# Altium PCB PCB1.PcbDoc
Units mil, origin at the board's own origin, x right, y up, seen from the top; angles counter-clockwise.
Board outline 1540 x 765 mil, 2 copper layers (Top Layer, Bottom Layer); 23 components, 44 nets, 149 pads, 10 vias.
Unrouted connection lines stored in the file: 11.
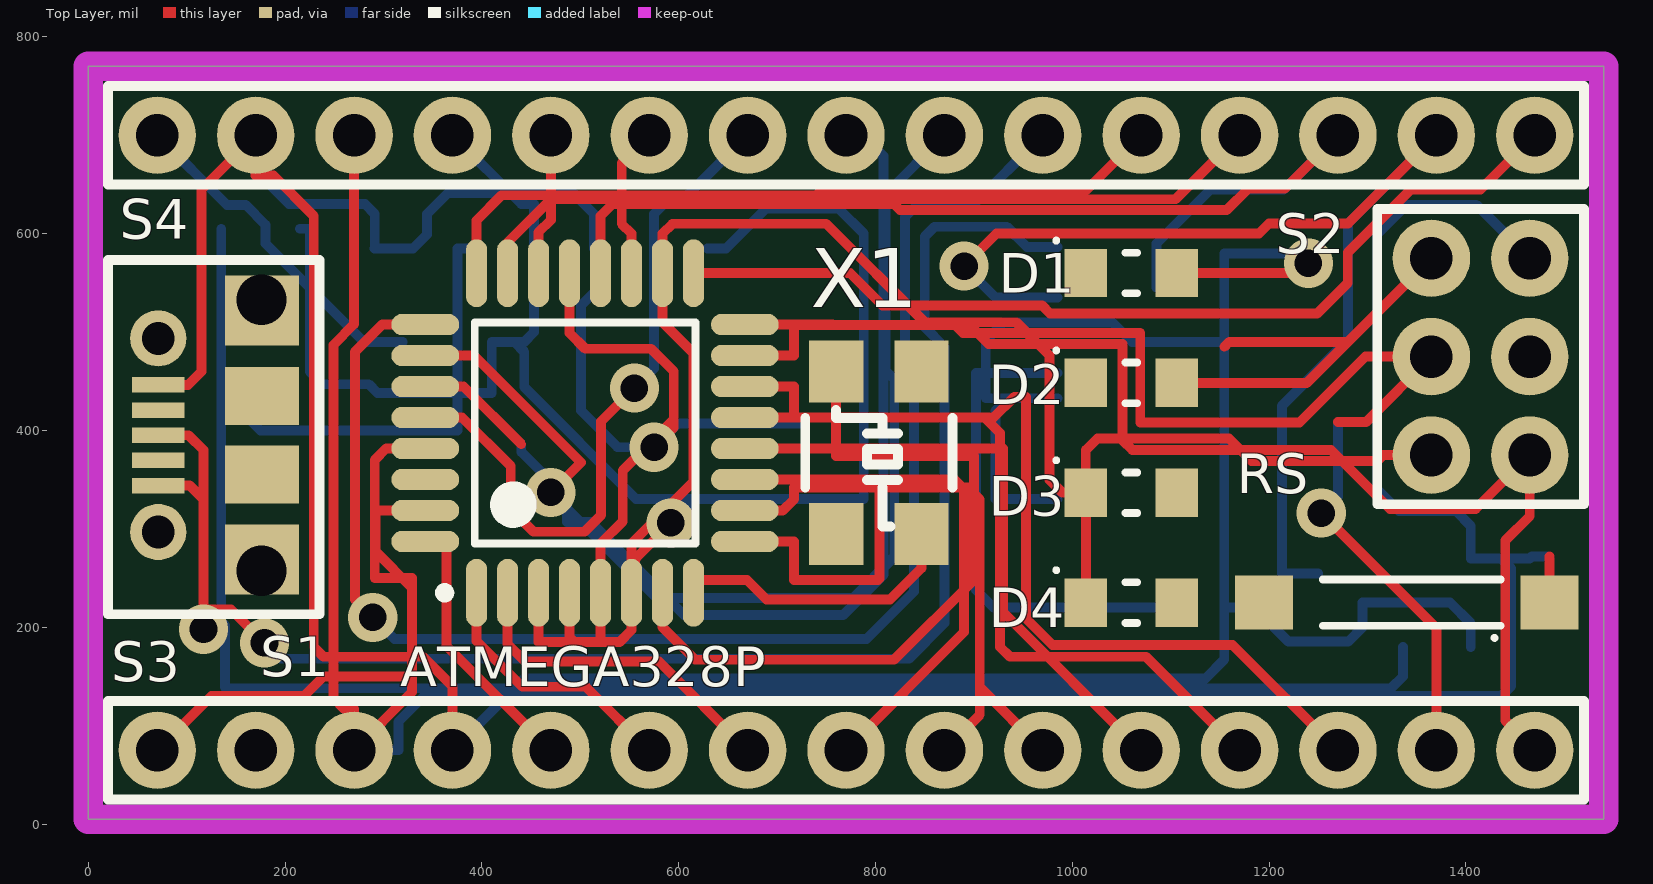
[diagram p0: Top Layer view]
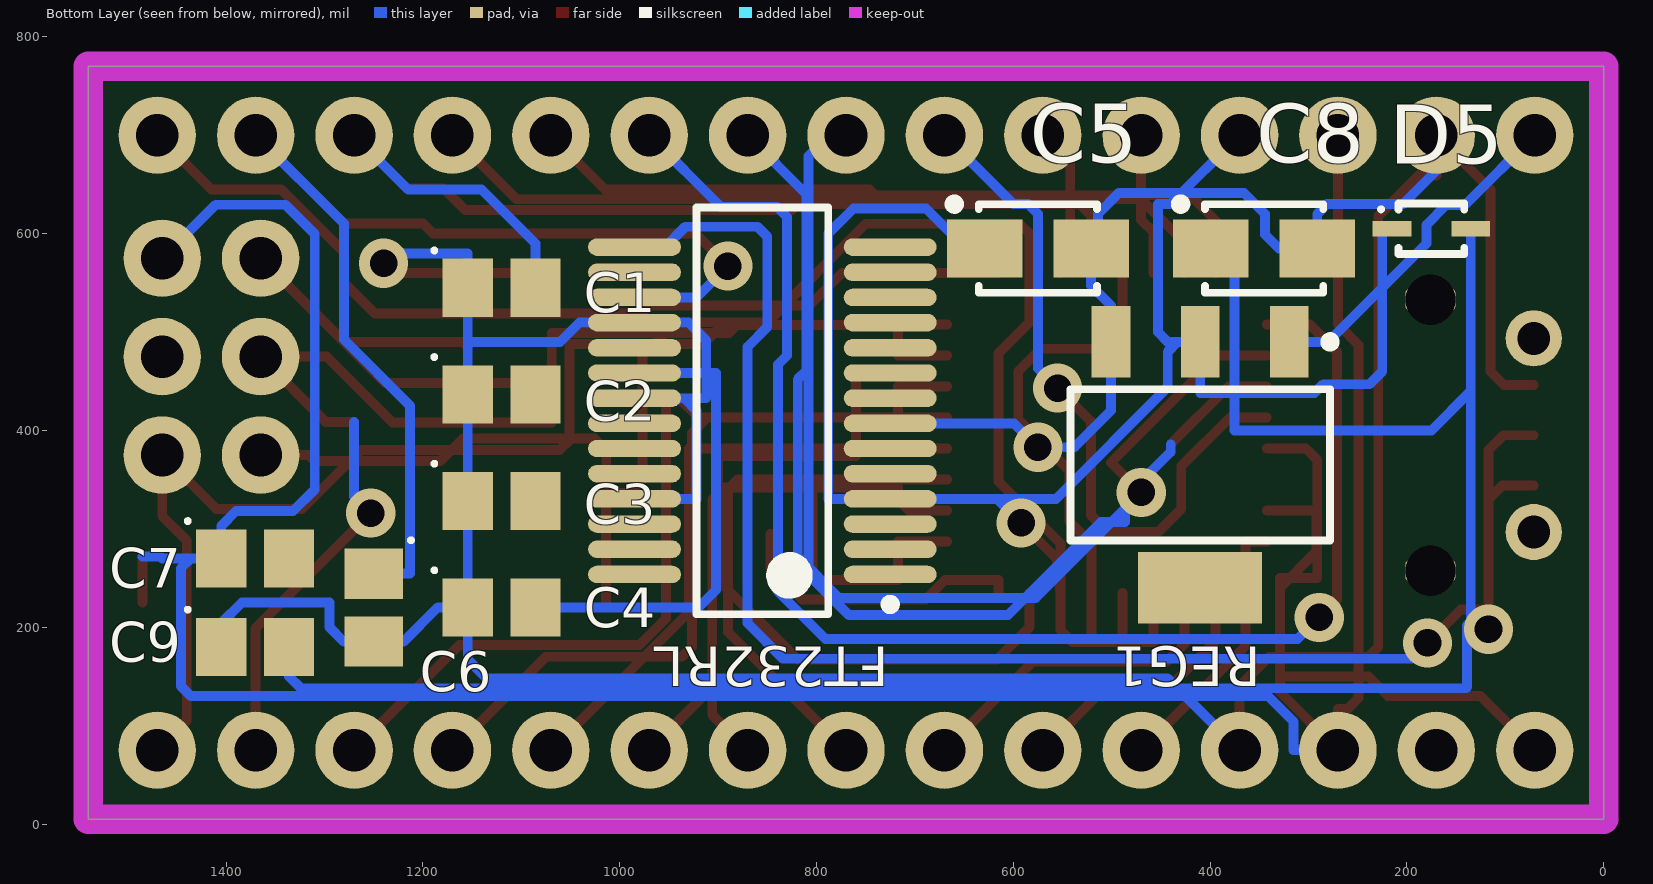
[diagram p1: Bottom Layer view, seen from below]

## Layer stack, top to bottom
Top Solder: solder mask 0.4, Solder Resist, Dk 3.5
Top Layer: signal copper 1.4
Dielectric 1: dielectric 12.6, FR-4, Dk 4.8
Bottom Layer: signal copper 1.4
Bottom Solder: solder mask 0.4, Solder Resist, Dk 3.5

## Board outline
0,5 1540,5 1540,770 0,770

## Design rules (kind name [scope] priority, off if disabled: settings)
Clearance [All] p1: gap=10 ignorepadtopadclearanceinfootprint=FALSE
PolygonConnect [All] p1: connectstyle=Relief reliefconductorwidth=10 reliefentries=4 polygonreliefangle="90 Angle" airgapwidth=10
RoutingVias [All] p1: holewidth=28 width=50 viastyle="Through Hole" minholewidth=28 minwidth=50 maxholewidth=28 maxwidth=50
SolderMaskExpansion [All] p1: expansion=4 istentingtop=FALSE
Width [All] p1: maxlimit=10 minlimit=10 preferedwidth=10
30 further rules are at their usual default settings.

## Components (designator, comment, footprint, x,y, rotation, side; value= is the part's Value field where it differs from the comment)
ATMEGA328P "ATMEGA328P-AU" TQFP80P900X900X120-32N 504.76,397.4 r90 top
C1 "100nF Ceramic Multilayer Capacitor_1" CAPCP2012X09N 1120,545 r180 bottom
C2 "C0805C180J5GACTU" CAPCP2012X09N 1120,436.67 r180 bottom
C3 "C0805C180J5GACTU" CAPCP2012X09N 1120,328.33 r180 bottom
C4 "100nF Ceramic Multilayer Capacitor_1" CAPCP2012X09N 1120,220 r180 bottom
C5 "Capacitor SMT Tantalum" "CASE A - 3216X18" 575,585 r180 bottom value=4.7µF
C6 "100nF Ceramic Multilayer Capacitor_1" CAPCP2012X09N 1250,220 r270 bottom
C7 "100nF Ceramic Multilayer Capacitor_1" CAPCP2012X09N 1370.55,270 r180 bottom
C8 "Capacitor SMT Tantalum" "CASE A - 3216X18" 345,585 r180 bottom value=4.7µF
C9 "100nF Ceramic Multilayer Capacitor_1" CAPCP2012X09N 1370.55,180 r180 bottom
D1 "Kingbright Blue LED, 60 mcd 120 ° 0805" LED1913X12NBLUE 1060,560 r0 top
D2 "Kingbright Red LED, 100 mcd 120 ° 0805" LED1913X12NRED 1060,448.33 r0 top
D3 "Kingbright Red LED, 100 mcd 120 ° 0805" LED1913X12NRED 1060,336.67 r0 top
D4 "Kingbright Green LED, 70 mcd 120 ° 0805" LED1913X12NGREEN 1060,225 r0 top
D5 "Panasonic DB2J20900L Schottky Diode, 0.5A, 20V, 2.4ns, 2-Pin SMini2 F5 B" DIOM1712X07N 175,605 r180 bottom
FT232RL "FT232RL, Universal Asynchronous Receiver & Transmitter 3MBd, 28-Pin, SSOP" SOP65P780X200-28N 855,420 r0 bottom
REG1 "LM1117MP-5.0/NOPB, Low Dropout Voltage Regulator, 1.5A, 5 V ±1%, 4-Pin SOT-223" SOT230P700X180-4N 410,365 r270 bottom
RS "Button Tactile Switch, NO 0.05 A 0.8mm" Button8014X17N 1345,225 r180 top (schematic designator SW)
S1 "NewMolex Right Angle SMT Female Type B Micro USB Connector, 30 V ac, 1.8A" MicroUSB 71,346.73 r90 top
S2 "Programming Headers Dual Row" "ISP HEADER" 910,-320 r90 top
S3 "connector;str header;single row;.1 cont centers;.095 tail;gold or gtx;36 contact" Header 70,75 r0 top
S4 "connector;str header;single row;.1 cont centers;.095 tail;gold or gtx;36 contact" Header 70,700 r0 top
X1 "Aker 16MHz Crystal SMT" "Aker S5C Crystal" 760,460 r90 top value=16MHz

## Footprints (in the part's own frame and the unit in brackets; to place one, negate y for a bottom-side part, rotate by r counter-clockwise, add the part's x,y. Pads: shape width x height; smd on the part's side, far side on the other; paste and mask are expansions set on the pad)
"Aker S5C Crystal" [mm]
  rect 1.6x1.4 smd: 1(0,0) 2(-4.2,0) 3(0,-2.2) 4(-4.2,-2.2)
  round 0.254 on Top Overlay: 5(-3,-2.4)
  silkscreen extent -4,-3 -1,0.8, body extent -4.7,-2.8 0.5,0.6, height 1
Button8014X17N [mm] "Chip Inductor, 2-Leads, Body 8.00x1.40mm, IPC Medium Density"
  rect 1.5x1.4 smd: 1(-3.556,0) 2(3.81,0)
  silkscreen extent -2.3,-0.6 2.3,0.96, body extent -3.79,-1.92 4.21,1.78, height 2.5
CAPCP2012X09N [mm] "Chip Capacitor, 2-Leads, Body 2.00x1.25mm, IPC Medium Density"
  rect 1.3x1.5 smd: 1(-0.875,0) 2(0.875,0)
  silkscreen extent -1.79,0.91 -1.69,1.01, body extent -1.05,-0.57 0.95,0.68, height 0.78
"CASE A - 3216X18" [mm] "Molded Capacitor, 2-Leads, Body 3.2x1.6mm, IPC Medium Density"
  rect 1.95x1.5 smd: 1(-1.375,0) 2(1.375,0)
  silkscreen extent -2.28,-1.14 1.52,1.27, body extent -1.52,-0.76 1.65,0.84, height 1.77
DIOM1712X07N [mm] "Molded Diode, 2-Leads, Body 1.70x1.25mm, IPC Medium Density"
  rect 1x0.4 smd: 1(-1.016,0) 2(1.016,0)
  silkscreen extent -1.35,-0.65 0.85,0.65, body extent -0.9,-0.45 0.9,0.45, height 0.8
Header [mm] "SIL Header"
  round 2 hole 1.1: 1(0,0) 2(2.54,0) 3(5.08,0) 4(7.62,0) 5(10.16,0) 6(12.7,0) 7(15.24,0) 8(17.78,0) 9(20.32,0) 10(22.86,0) 11(25.4,0) 12(27.94,0) 13(30.48,0) 14(33.02,0) 15(35.56,0)
  silkscreen extent -1.27,-1.27 36.83,1.27, body extent -1.33,-1.35 36.93,1.35, height 8.6
"ISP HEADER" [mm] "SIL Header for programming"
  round 2 hole 1.1: 1(17.653,-14.097) 2(17.653,-11.557) 3(20.193,-14.097) 4(20.193,-11.557) 5(22.733,-14.097) 6(22.733,-11.557)
  silkscreen extent 16.38,-15.49 24,-10.16, body extent 16.38,-15.37 24,-10.29, height 8
LED1913X12NBLUE [mm] "LED 2-Leads, Body 1.90x1.32mm, IPC Medium Density"
  rect 1.1x1.25 smd: 1(-1.175,0) 2(1.175,0)
  silkscreen extent -1.99,-0.53 0.15,0.89, body extent -1,-0.62 1.02,0.62, height 1.1
LED1913X12NGREEN [mm] "LED 2-Leads, Body 1.90x1.32mm, IPC Medium Density"
  rect 1.1x1.25 smd: 1(-1.175,0) 2(1.175,0)
  silkscreen extent -1.99,-0.53 0.15,0.89, body extent -1.01,-0.62 1.01,0.63, height 1.1
LED1913X12NRED [mm] "LED 2-Leads, Body 1.90x1.32mm, IPC Medium Density"
  rect 1.1x1.25 smd: 1(-1.175,0) 2(1.175,0)
  silkscreen extent -1.99,-0.52 0.15,0.89, body extent -1.02,-0.43 1.04,0.47, height 0.85
MicroUSB [mm] "MicroUSB  Molex 5Pin"
  rect 0.4x1.35 smd: 1(-0.07,0) 2(0.58,0) 3(1.23,0) 4(1.88,0) 5(2.53,0)
  rrect50% 0.6x1.3 hole 1.3: ""(-2.27,-2.667) ""(-2.27,-2.667) ""(4.73,-2.667)
  rect 1.8x1.9 smd: ""(-1.98,-2.678) ""(4.45,-2.678)
  round 1.45 hole 0.85: ""(-1.27,0) ""(3.73,0)
  rect 1.5x1.9 smd: ""(0.218,-2.678) ""(2.242,-2.678)
  silkscreen extent -3.39,-4.17 5.75,1.3, body extent -2.83,-5.32 5.37,0.11, height 2.68
SOP65P780X200-28N [mm] "SOP, 28-Leads, Body 10.20x5.30mm, Pitch 0.65mm, IPC Medium Density"
  oval 2.4x0.45 smd: 1(-3.3,4.225) 2(-3.3,3.575) 3(-3.3,2.925) 4(-3.3,2.275) 5(-3.3,1.625) 6(-3.3,0.975) 7(-3.3,0.325) 8(-3.3,-0.325) 9(-3.3,-0.975) 10(-3.3,-1.625) 11(-3.3,-2.275) 12(-3.3,-2.925) 13(-3.3,-3.575) 14(-3.3,-4.225) 15(3.3,-4.225) 16(3.3,-3.575) 17(3.3,-2.925) 18(3.3,-2.275) 19(3.3,-1.625) 20(3.3,-0.975) 21(3.3,-0.325) 22(3.3,0.325) 23(3.3,0.975) 24(3.3,1.625) 25(3.3,2.275) 26(3.3,2.925) 27(3.3,3.575) 28(3.3,4.225)
  silkscreen extent -3.42,-5.25 1.7,5.25, body extent -3.91,-5.1 3.91,5.1, height 2
SOT230P700X180-4N [mm] "SOT223, 4-Leads, Body 6.50x7.00mm (avg), Pitch 2.30mm, IPC Medium Density"
  rect 1.85x1 smd: 1(-3.175,2.3) 2(-3.175,0) 3(-3.175,-2.3)
  rect 1.85x3.2 smd: 4(3.175,0)
  silkscreen extent -3.3,-3.35 1.95,3.47, body extent -3.8,-3.12 3.29,3.38, height 1.65
TQFP80P900X900X120-32N [mm] "TQFP, 32-Leads, Body 7.00x7.00mm, Pitch 0.80mm, IPC Medium Density"
  oval 1.75x0.55 smd: 1(-4.125,2.8) 2(-4.125,2) 3(-4.125,1.2) 4(-4.125,0.4) 5(-4.125,-0.4) 6(-4.125,-1.2) 7(-4.125,-2) 8(-4.125,-2.8) 17(4.125,-2.8) 18(4.125,-2) 19(4.125,-1.2) 20(4.125,-0.4) 21(4.125,0.4) 22(4.125,1.2) 23(4.125,2) 24(4.125,2.8)
  oval 0.55x1.75 smd: 9(-2.8,-4.125) 10(-2,-4.125) 11(-1.2,-4.125) 12(-0.4,-4.125) 13(0.4,-4.125) 14(1.2,-4.125) 15(2,-4.125) 16(2.8,-4.125) 25(2.8,4.125) 26(2,4.125) 27(1.2,4.125) 28(0.4,4.125) 29(-0.4,4.125) 30(-1.2,4.125) 31(-2,4.125) 32(-2.8,4.125)
  silkscreen extent -4.25,-2.85 2.85,3.75, body extent -4.44,-4.5 4.56,4.5, height 1.6

## Part data
ATMEGA328P: "ATMEGA328P-AU, 8 bit AVR Microcontroller 20MHz 1 kB, 32 kB Flash, 2 kB RAM, I2C 32-Pin TQFP", Company="Lumina Inova", Created By="Ritesh Kanjee", Datasheet URL=http://docs-europe.electrocomponents.com/webdocs/0db4/0900766b80db4deb.pdf, Date Created="14 February 2015", RS Stock No.=696-3092
C1 C4 C6 C7 C9: "AVX 0805 Standard 100nF Ceramic Multilayer Capacitor, 50 V dc X7R Dielectric ±10% SMD", Capacitance=100nF, Manufacturer=AVX, Package=0805, Voltage=50V, Creator="Ritesh Kanjee", Datasheet URL=http://za.rs-online.com/web/p/ceramic-multilayer-capacitors/4646688/, Date Created="18 February 2015", RS Stock No.=464-6688
C2 C3: library part "18pF Ceramic Multilayer Capacitor, 50 V dc C0G Dielectric ±5% SMD", "18pF Ceramic Multilayer Capacitor, 50 V dc C0G Dielectric ±5% SMD", Capacitance=18pF, Manufacturer=Kemet, Package=0805, Voltage=50V, Creator="Ritesh Kanjee", Datasheet URL=http://za.rs-online.com/web/p/ceramic-multilayer-capacitors/6480935/?searchTerm=C0805C180J5GACTU&relevancy-data=636F3D3226696E3D4931384E4B6E6F776E41734D504E266C753D656E266D6D3D6D61746368616C6C7061727469616C26706D3D5E5B5C707B4C7D5C707B4E647D2D2C2F255C2E5D2B2426706F3D313326736E3D592673743D4D414E5F504152545F4E554D4245522677633D424F5448267573743D4330383035433138304A35474143545526, Date Created="18 February 2015", RS Stock No.=648-0935
C5 C8: library part "4.7µF Tant RS 496-3545", "Capacitor,tantalum,SMT,16V,4.7uF,10%,A-case", Package=3216-18, Tolerance=10%, Voltage=16V, ComponentLink1Description="Supplier Website", ComponentLink1URL=http://za.rs-online.com/web/search/searchBrowseAction.html?method=getProduct&R=4963545, ComponentLink2Description="RS Data sheet", ComponentLink2URL=http://docs-europe.origin.electrocomponents.com/webdocs/04ed/0900766b804ed4cc.pdf, LatestRevisionDate=28-April-2010, Part Originator="H Theron", Publisher=DPSS, RS Stock Nr.=496-3545
D1: Color=Blue, Forward Voltage=3.2V, Manufacturer=KingBright, Manufacturer Part No.=KP-2012PBC-A, Creator="Ritesh Kanjee", Datasheet URL=http://za.rs-online.com/web/p/visible-leds/4663784/, Date Created="18 February 2015", RS Stock No.=466-3784
D2 D3: Color=RED, Forward Voltage=1.85V, Manufacturer=KingBright, Manufacturer Part No.=KP-2012SRC-PRV, Creator="Ritesh Kanjee", Datasheet URL=http://za.rs-online.com/web/p/visible-leds/4663813/, Date Created="18 February 2015", RS Stock No.=466-3813
D4: Color=Green, Forward Voltage="2.1 V", Manufacturer=KingBright, Manufacturer Part No.=KP-2012MGC, Creator="Ritesh Kanjee", Datasheet URL=http://za.rs-online.com/web/p/visible-leds/4663778/, Date Created="18 February 2015", RS Stock No.=466-3778
D5: library part "Schottky Diode, 0.5A, 20V, 2.4ns, 2-Pin SMini2 F5 B", Manufacturer=Panasonic, Manufacturer Part No.=DB2J20900L, Maximum Continuous Forward Current=0.5A, Peak Reverse Repetitive Voltage=20V, Created By="R Kanjee", Datasheet=http://docs-europe.electrocomponents.com/webdocs/1398/0900766b813986b3.pdf, Date Created="1 March 2015", RS Stock No.=713-2703
FT232RL: library part "FT232RL USB to UART, Universal Asynchronous Receiver & Transmitter 3MBd, 28-Pin, SSOP", Manufacturer="FTDI Chip", Manufacturer Part No.=FT232RL, Creator="R Kanjee", Date Created="03 March 2015", Pin Count=28, RS Stock No.=406-580
REG1: library part LM1117MP-5.0, Manufacturer="Texas Instruments", Maximum Input Voltage=15V, Output Voltage=5V, Supply Current=1.5Amps, Created By="R Kanjee", Datasheet URL=http://za.rs-online.com/web/p/low-dropout-voltage-regulators/5339583/, Date Created="26 February 2015", RS Stock No.=533-9583
RS: Manufacturer="C & K", Manufacturer Part No.=B3F1000, Creator="R Kanjee", Date Created="25 February 2015", RS Stock No.=516-255, State="Normaly Open"
S1: library part "Micro USB Connector, 30 V ac, 1.8A", Manufacturer=Molex, Manufacturer Part No.=105017-0001, Max Current=1.8A, Max Voltage=30V, Creator="R Kanjee", Datasheet URL=http://za.rs-online.com/web/p/micro-usb-connectors/8486764/, Date Created="28 February 2015", RS Stock No=848-6764
S2: library part "Programming ISP, Programming Headers Dual Row", Current Rating="3Amps Continuous", Manufacturer=FCI, Manufacturer Part No.=68000-236HLF, Created By="R Kanjee", Date Created="1 March 2015", RS Stock No.=2509565626
S3 S4: library part "Single row; PCB headers", Current Rating="3Amps Continuous", Manufacturer=FCI, Manufacturer Part No.=68000-236HLF, Created By="R Kanjee", Date Created="1 March 2015", RS Stock No.=2509565626
X1: library part "Aker  C5S-16.000-12-3030-X", "Aker S5C SMT Crystal", Frequency Stability=+/-30ppm, Load Capacitance=12pF, Manufacturer=Aker, Manufacturer Part #=C5S-16.000-12-3030-X, Package="3.2x5mm SMD", Creator="R Kanjee", HelpURL=http://za.rs-online.com/web/p/crystal-units/6719488/, RS="RS 671-9488", RS Stock Nr.=671-9488, Supplier=RS

## Via types
v1: diameter 50, hole 28, Top Layer to Bottom Layer, 10 vias

## Nets (pads, with @x,y where several pads share a name; then routed paths per layer and width w, separated by ;. In a path a pad name is that pad's centre, name@x,y a point inside that pad or via, vN(x,y) a via of type N, cw(c..) or ccw(c..) an arc to the next point about the centre after c; other vN are vias at no path point)
3v3: C6.1 FT232RL.17 S4.14 | length 1190.8
  Top Layer w10: v1(890,567) 923,600 1189.7,600 1200.09,610.39 1280.39,610.39 S4.14
  Bottom Layer w10: v1(890,567) 921.84,535.16 FT232RL.17 ; C6.1 1213,254.45 1213,425.14 1280.24,492.38 1280.24,610.24 S4.14
+5: ATMEGA328P.4 ATMEGA328P.6 ATMEGA328P.18 C4.2 C5.1 D3.1 D4.1 D5.1 FT232RL.4 FT232RL.20 REG1.2 S2.2 S4.4 | length 3905.6
  Top Layer w10: ATMEGA328P.4 489.02,189.98 494,185 540,185 552.01,197.01 ATMEGA328P.6 ; v1(592,306) 556,270 ATMEGA328P.6 ; D4.1 1014,225 1014,336.67 D3.1 ; S2.2 1316,375 1310,369 1182,369 1159.26,391.74 1025.48,391.74 1013.74,380 D3.1 ; ATMEGA328P.6 552.01,285 615,347.99 615,478.5 583.5,510 ATMEGA328P.18 583.5,600 593.5,610 750,610 850,510 943,510 977,476 977,349.67 990,336.67 D3.1
  Bottom Layer w10: D5.1 225,605 225,460 238,447 285,447 294,438 410,438 REG1.2 433,490 ; S4.4 440,630 453,630 453,500 443,490 433,490 ; v1(592,306) 616.43,330.43 ; C5.1 648,585 688.63,625.63 762.37,625.63 788,600 788,330.43 FT232RL.4 616.43,330.43 ; FT232RL.20 902,458.39 902,238 920,220 C4.2 ; 433,490 443,480 443,444 556.57,330.43 616.43,330.43
A0: ATMEGA328P.23 S4.12 | length 820.3
  Top Layer w10: ATMEGA328P.23 426.02,591.02 470,635 1105,635 S4.12
A1: ATMEGA328P.24 S4.11 | length 765
  Top Layer w10: ATMEGA328P.24 394.53,613.53 420,639 740,639 746,645 1015,645 S4.11
A2: ATMEGA328P.25 S4.10 | length 1498.3
  Top Layer w10: v1(289,210) 271,228 271,480 298.64,507.64 ATMEGA328P.25
  Bottom Layer w10: v1(289,210) 311,188 790.86,188 839,236.14 839,467 830,476 830,617 840,627 897,627 S4.10
A3: ATMEGA328P.26 S4.9 | length 1114
  Top Layer w10: ATMEGA328P.26 391.96,476.14 500.55,367.55 v1(470,337)
  Bottom Layer w10: v1(470,337) 577.2,229.8 777.13,229.8 819,271.68 819,452.11 810,461.11 810,640 S4.9
A4: ATMEGA328P.27 S4.8 | length 1070.1
  Top Layer w10: ATMEGA328P.27 381.35,444.65 440,386
  Bottom Layer w10: 440,386 440,378 486.6,331.4 486.6,307.03 510.97,307.03 605.5,212.5 767.21,212.5 808,253.29 808,679 787,700 S4.8
A5: ATMEGA328P.28 S4.7 | length 716
  Top Layer w10: ATMEGA328P.28 379.85,413.15 429.29,363.71 429.29,320 452.29,297 504.23,297 521,313.77 521,409 v1(555,443)
  Bottom Layer w10: v1(555,443) 575,463 575,620 585,630 600,630 S4.7
A6: ATMEGA328P.19 S4.6 | length 155.9
  Top Layer w10: ATMEGA328P.19 552.01,600 542.01,610 542.01,672.01 S4.6
A7: ATMEGA328P.22 S4.5 | length 145.4
  Top Layer w10: ATMEGA328P.22 457.52,601.52 470,614 S4.5
AREF: ATMEGA328P.20 C1.2 S4.13 | length 1121.6
  Top Layer w10: ATMEGA328P.20 520.51,618 532.51,630 819,630 825,624 1157,624 1179,646 1216,646 S4.13
  Bottom Layer w10: C1.2 1085.55,590 1140.55,645 1215,645 S4.13
D0/Rx: ATMEGA328P.30 S3.2
D1/Tx: ATMEGA328P.31 S3.1 | length 524.4
  Top Layer w10: S3.1 125,130 219,130 239,150 329,150 329,240 292,277 292,318.66 ATMEGA328P.31
D2: ATMEGA328P.32 S3.5 | length 277.7
  Top Layer w10: ATMEGA328P.32 364,287.17 364,181 S3.5
D3: ATMEGA328P.1 S3.6 | length 270.4
  Top Layer w10: ATMEGA328P.1 394.53,186 441.11,139.42 505.58,139.42 S3.6
D4: ATMEGA328P.2 S3.7 | length 340.7
  Top Layer w10: ATMEGA328P.2 426.02,182.98 444,165 580,165 S3.7
D5: ATMEGA328P.9 S3.8 | length 671.6
  Top Layer w10: ATMEGA328P.9 717,287.17 717,248.15 802.56,248.15 804,249.59 804,342 890,342 890,195 S3.8
D6: ATMEGA328P.10 S3.9 | length 530.4
  Top Layer w10: ATMEGA328P.10 705.66,318.66 717,330 717,342 894,342 906,330 906,111 S3.9
D7: ATMEGA328P.11 S3.10 | length 525.3
  Top Layer w10: ATMEGA328P.11 880,350.16 906,324.16 906,139 S3.10
D8: ATMEGA328P.12 S3.11 | length 627.2
  Top Layer w10: ATMEGA328P.12 929.5,381.65 929.5,215.5 S3.11
D9: ATMEGA328P.13 S3.12 | length 770.2
  Top Layer w10: ATMEGA328P.13 910.68,413.15 926.5,397.33 926.5,180 936.5,170 1075,170 S3.12
D10: ATMEGA328P.14 S3.13 | length 923.7
  Top Layer w10: ATMEGA328P.14 717,444.65 717,413 920,413 941,434 953,434 953,209 980,182 1163,182 S3.13
D11/MOSI: ATMEGA328P.15 S2.4 S3.14 | length 1362.4
  Top Layer w10: ATMEGA328P.15 717,476.14 717,507 881,507 889,499 1069,499 1069,408 1231,408 1298,475 S2.4 1298.73,408.73 1270,408.73 ; v1(1253,316) 1370,199 S3.14
  Bottom Layer w10: v1(1253,316) 1270,333 1270,408.73
D12/MISO: ATMEGA328P.16 S2.1 S3.15 | length 1278.5
  Top Layer w10: ATMEGA328P.16 756.36,507.64 757,507 896,507 915,488 1051,488 1051,390 1061,380 1263,380 1323,320 1410,320 S2.1 1465,313 1440,288 1440,105 S3.15
D13/SCK: ATMEGA328P.17 S2.3 S4.15 | length 965.3
  Top Layer w10: ATMEGA328P.17 615,560 774,560 807,527 969.5,527 977.5,519 1249,519 1280,550 1280,581 1344,645 1415,645 S4.15
GND: ATMEGA328P.3 ATMEGA328P.5 ATMEGA328P.21 C1.1 C2.1 C3.1 C4.1 C5.2 C6.2 C8.2 C9.1 D1.2 D2.2 FT232RL.7 FT232RL.18 FT232RL.21 FT232RL.25 REG1.3 S1.5 S2.6 S3.4 S4.2 | length 5461.8
  Top Layer w10: S1.5 101.34,446.34 115,460 115,645 S4.2 170,659 188,659 229,618 229,180 239,170 340,170 370,140 S3.4 ; ATMEGA328P.3 457.52,185 520.51,185 ATMEGA328P.5 520.51,285 543.1,307.59 543.1,359.49 595,411.39 ; ATMEGA328P.21 489.02,498.98 505,483 572,483 595,460 595,411.39 ; v1(575,383) 595,403 595,411.39 ; D2.2 1238.33,448.33 1280,490 ; D1.2 1230,560 v1(1240,570) ; 1154.45,485 1159.45,490 1280,490 ; S2.6 1280,490
  Bottom Layer w10: S4.2 170,664 204,630 281,630 291,620 C8.2@291,585 ; C8.2 C8.2@291,585 ; S3.4 443,148 1135.45,148 1154.45,167 C4.1 ; FT232RL.7 599.2,407.2 v1(575,383) 537.91,383 500.55,420.36 REG1.3 500.55,527 520.87,547.31 C5.2 514,585 514,620 492.76,641.24 365.49,641.24 344.24,620 344.24,599.24 330,585 C8.2@291,585 ; FT232RL.25 922,330.43 922,420 934.8,432.8 ; FT232RL.21 934.8,432.8 ; v1(1240,570) 1230,580 1154.45,580 C1.1 1154.45,490 ; C9.1 1405,204 1384,225 1295,225 1295,200 1280.55,185.55 C6.2 1219.45,185.55 1185,220 C4.1 ; 934.8,432.8 912,432.8 912,491.57 930,509.57 FT232RL.18 1041,509.57 1060.57,490 1154.45,490 ; C4.1 C3.1 C2.1 1154.45,490
NetC2_2: C2.2 X1.3
NetC3_2: C3.2 X1.2
NetC7_2: C7.2 FT232RL.2
NetD1_1: D1.1
NetD2_1: D2.1
NetD3_2: D3.2
NetD4_2: D4.2
NetFT232RL_15: FT232RL.15 S1.3 | length 1551.7
  Top Layer w10: S1.3 101.84,395.16 117,380 117,218 145,218 v1(179,184)
  Bottom Layer w10: v1(179,184) 195,168 833.87,168 870,204.13 870,485 850,505 850,597 860,607 933.34,607 954,586.34 FT232RL.15
NetFT232RL_16: FT232RL.16 S1.2
NetFT232RL_22: FT232RL.22
NetFT232RL_23: FT232RL.23
RESET: ATMEGA328P.29 C7.1 RS.1 S2.5 S3.3 S4.3 | length 3136.5
  Top Layer w10: S4.3 270,508 249,487 249,128 260,117 270,117 S3.3 329,134 329,250 291,250 291,370 302.65,381.65 ATMEGA328P.29 ; RS.1 1485,272
  Bottom Layer w10: S3.3 315,75 315,104 341,130 1436,130 1446,140 1446,260 1436,270 ; S2.5 1410.63,629.37 1339.79,629.37 1310,599.59 1310,340 1332,318 1390,318 1405,303 C7.1 1436,270 ; 1485,272 1467,272 1465,270 1436,270
Rx: FT232RL.1
Tx: FT232RL.5
VIN: REG1.1 S4.1 | length 347.6
  Bottom Layer w10: S4.1 141,629 160,629 180,609 180,590 280,490 REG1.1
VUSB: C8.1 C9.2 D5.2 S1.1 | length 2375.1
  Top Layer w10: S1.1 103.02,343.98 117,330 v1(117,198)
  Bottom Layer w10: v1(117,198) 135,216 ; D5.2 135,440 ; C8.1 375,585 375,400 175,400 135,440 ; C9.2 1336.1,150 1324.1,138 140,138 139,139 139,202 135,206 135,216 ; 135,216 135,440
XTAL1: ATMEGA328P.7 X1.1 | length 750.7
  Top Layer w10: ATMEGA328P.7 583.5,200 616.5,167 819,167 900,248 900,374 760,374 X1.1
XTAL2: ATMEGA328P.8 X1.4 | length 300.7
  Top Layer w10: ATMEGA328P.8 615,248 669.29,248 689.14,228.15 814.76,228.15 846.61,260 X1.4
pads on no net: FT232RL.3 FT232RL.6 FT232RL.8 FT232RL.9 FT232RL.10 FT232RL.11 FT232RL.12 FT232RL.13 FT232RL.14 FT232RL.19 FT232RL.24 FT232RL.26 FT232RL.27 FT232RL.28 REG1.4 RS.2 S1. S1.4 X1.5

## Keep-outs
Keep-Out Layer:
  the board outline again, w30